# EAGLE board BudCure (EAGLE 9.6.2)
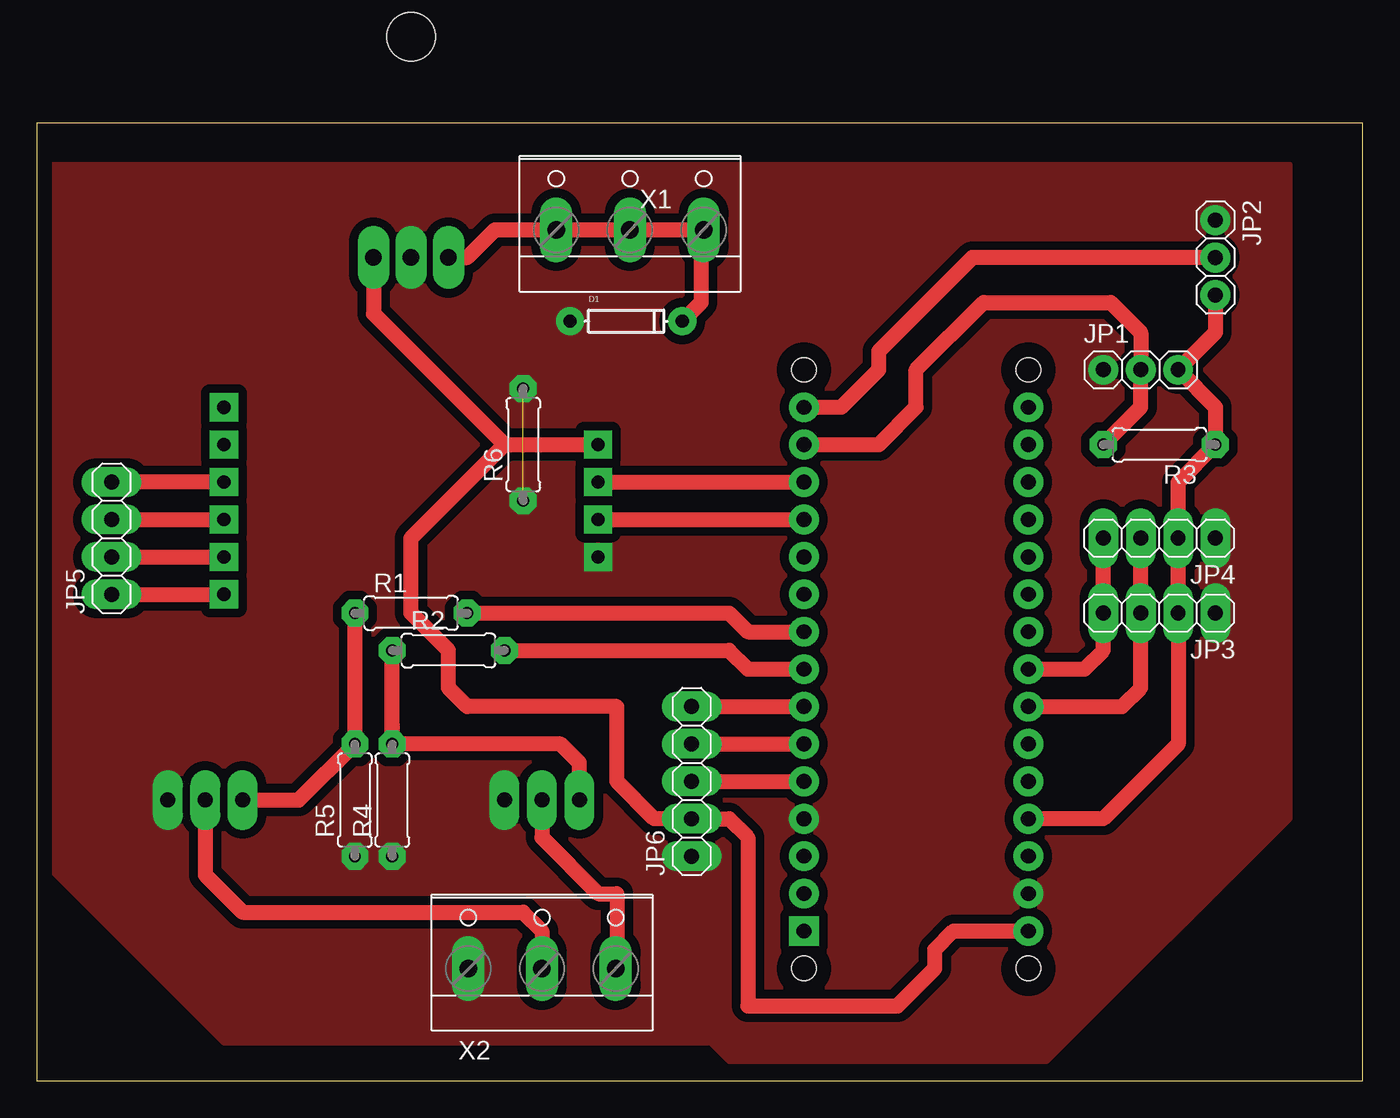
[diagram p0: board, top side]
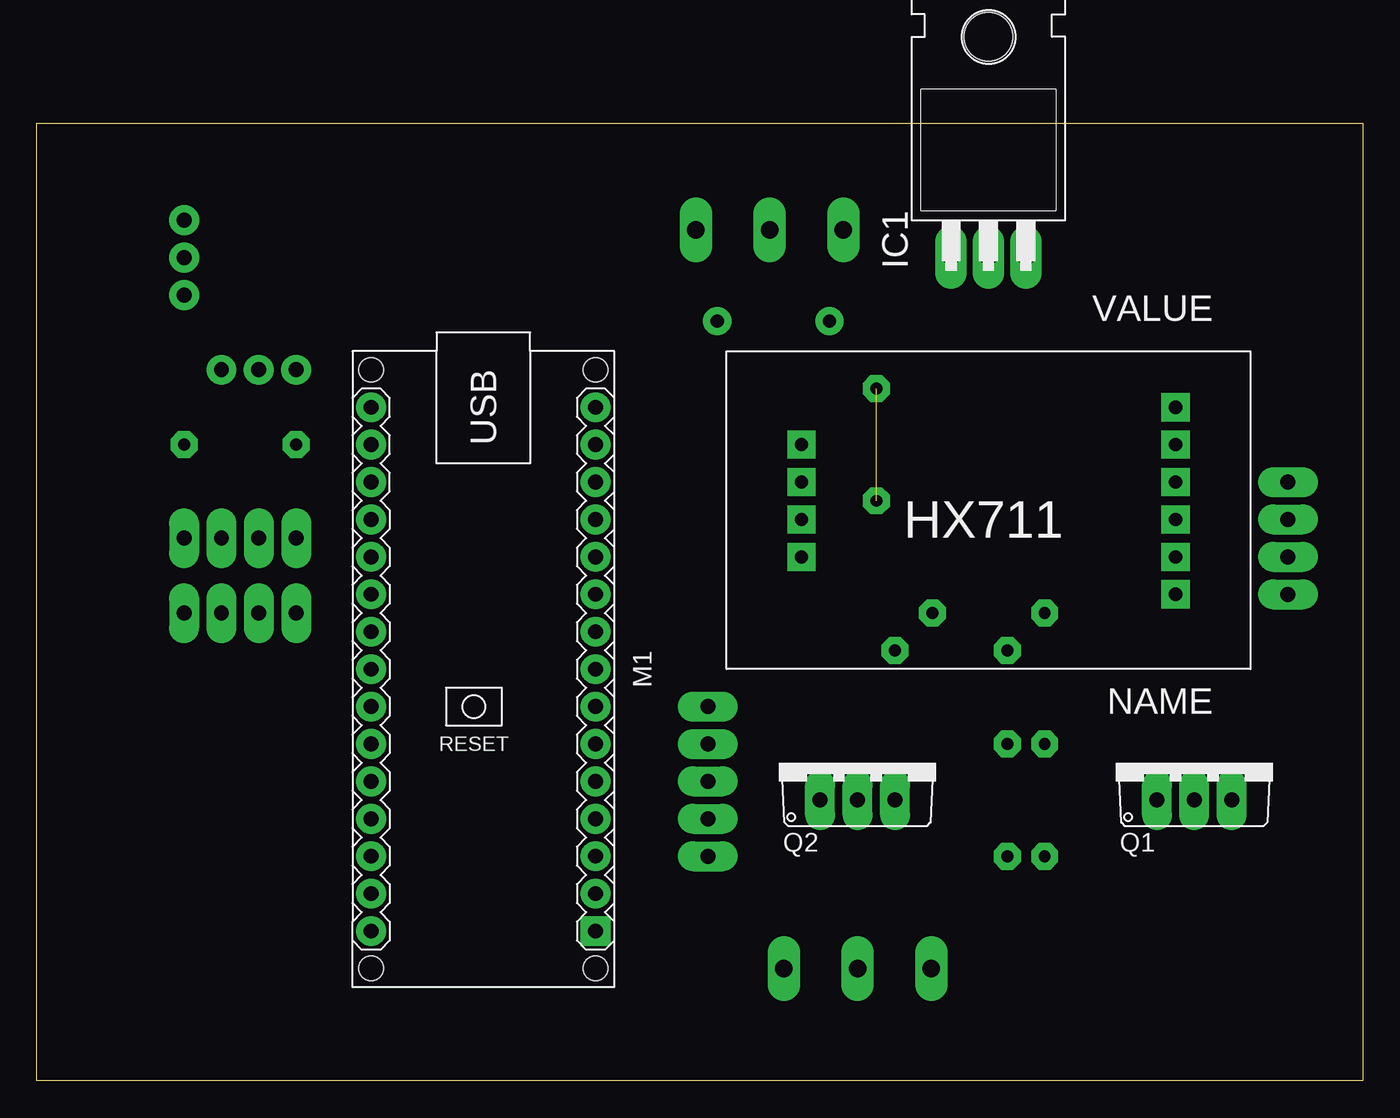
[diagram p1: board, bottom side, seen from below]

Size 90 x 65 mm. Coordinates in mm from the lower left corner, seen from the top.
Outline: 0,0 90,0 90,65 0,65 0,0
Copper layers (1*16): Top 0.035mm / dielectric 1.5mm / Bottom 0.035mm
Design rules "default *": minimum track width 6mil, minimum drill 0.35mm, track to track 6mil, track to pad 6mil, pad to pad 6mil, via to via 6mil, smd to smd 6mil, copper to edge 40mil, drill to drill 6mil, minimum pad ring 20mil, minimum via ring 8mil, stop-mask expansion 4mil, vias tented up to drill 0mil, thermal gap 0mil

## Footprints (pad centres in the part's own frame; a part is rotated, then mirrored left to right if it is on the bottom)
DO-1N4148 = drill 0.9: A -3.81,0; C 3.81,0
TO220H = drill 1.118 long: 1 -2.54,-10.16; 2 0,-10.16; 3 2.54,-10.16 | hole 3.302: 0,4.826
1X03 = drill 1.016: 1 -2.54,0; 2 0,0; 3 2.54,0
1X04 = drill 1.016 long: 1 -3.81,0; 2 -1.27,0; 3 1.27,0; 4 3.81,0
1X05 = drill 1.016 long: 1 -5.08,0; 2 -2.54,0; 3 0,0; 4 2.54,0; 5 5.08,0
ARDUINO-NANO-3.0 = drill 1 square: J1.1 17.78,7.62 | drill 1: J1.2 15.24,7.62; J1.3 12.7,7.62; J1.4 10.16,7.62; J1.5 7.62,7.62; J1.6 5.08,7.62; J1.7 2.54,7.62; J1.8 0,7.62; J1.9 -2.54,7.62; J1.10 -5.08,7.62; J1.11 -7.62,7.62; J1.12 -10.16,7.62; J1.13 -12.7,7.62; J1.14 -15.24,7.62; J1.15 -17.78,7.62; J2.1 17.78,-7.62; J2.2 15.24,-7.62; J2.3 12.7,-7.62; J2.4 10.16,-7.62; J2.5 7.62,-7.62; J2.6 5.08,-7.62; J2.7 2.54,-7.62; J2.8 0,-7.62; J2.9 -2.54,-7.62; J2.10 -5.08,-7.62; J2.11 -7.62,-7.62; J2.12 -10.16,-7.62; J2.13 -12.7,-7.62; J2.14 -15.24,-7.62; J2.15 -17.78,-7.62 | hole 1.651: -20.32,7.62; -20.32,-7.62; 20.32,-7.62; 20.32,7.62
TO220V = drill 1.016 long: 1 -2.54,-2.54; 2 0,-2.54; 3 2.54,-2.54
0207/7 = drill 0.813 octagon: 1 -3.81,0; 2 3.81,0
HX711 = drill 0.9 square: A+ 8.89,21.59; A- 8.89,24.13; B+ 8.89,16.51; B- 8.89,19.05; DT 34.29,24.13; E+ 8.89,29.21; E- 8.89,26.67; GND 34.29,26.67; SCK 34.29,21.59; VCC 34.29,19.05
W237-103 = drill 1.194 long: 1 -5,-1.29; 2 0,-1.29; 3 5,-1.29

## Placement (x,y rotation side)
D1  [DO-1N4148]  40.01,51.56 0 top
IC1  7805T  [TO220H]  25.4,66.04 0 bottom
JP1  [1X03]  74.93,48.26 0 top
JP2  [1X03]  80.01,55.88 270 top
JP3  [1X04]  76.2,31.75 180 top
JP4  [1X04]  76.2,36.83 180 top
JP5  [1X04]  5.08,36.83 90 top
JP6  [1X05]  44.45,20.32 90 top
M1  ARDUINO-NANO-3.0  [ARDUINO-NANO-3.0]  59.69,27.94 270 bottom
Q1  [TO220V]  11.43,21.59 0 bottom
Q2  [TO220V]  34.29,21.59 0 bottom
R1  [0207/7]  25.4,31.75 0 top
R2  [0207/7]  27.94,29.21 0 top
R3  [0207/7]  76.2,43.18 180 top
R4  [0207/7]  24.13,19.05 90 top
R5  [0207/7]  21.59,19.05 90 top
R6  [0207/7]  33.02,43.18 90 top
U$1  [HX711]  3.81,62.23 180 bottom
X1  [W237-103]  40.26,59.05 0 top
X2  [W237-103]  34.29,8.89 0 top

## Library data of the parts
D1 IC1 JP1 JP2 Q1 Q2 = adafruit
JP3-JP6 = pinhead
M1 = diy-modules
R1-R6 = rcl; SPICEPREFIX: R
U$1 = HX711
X1 X2 = con-wago-500; MPN: 237-103; OC_FARNELL: unknown; OC_NEWARK: 18M7116

## Nets
3V3: M1.J2.14
5V: IC1.3 JP6.2 M1.J2.1 U$1.VCC
GND: D1.A IC1.2 JP1.1 JP2.1 JP3.1 JP4.1 JP6.1 M1.J1.4 M1.J2.2 Q1.3 Q2.3 R4.1 R5.1 R6.1 R6.2 U$1.GND X2.1
N$1: M1.J1.8 R2.2
N$2: M1.J1.9 R1.2
N$3: JP6.3 M1.J1.5
N$4: JP6.4 M1.J1.6
N$5: JP5.1 U$1.E+
N$6: JP5.2 U$1.E-
N$7: JP1.3 JP2.3 JP3.2 JP4.2 M1.J2.4 R3.1
N$8: Q1.1 R1.1 R5.2
N$9: Q2.1 R2.1 R4.2
N$10: Q2.2 X2.3
N$11: Q1.2 X2.2
N$12: JP6.5 M1.J1.7
N$13: JP5.3 U$1.A-
N$14: JP5.4 U$1.A+
N$15: M1.J1.12 U$1.DT
N$16: M1.J1.13 U$1.SCK
N$17: JP3.3 JP4.3 M1.J2.7
N$18: JP3.4 JP4.4 M1.J2.8
N$20: JP1.2 M1.J1.14 R3.2
N$21: JP2.2 M1.J1.15
VIN: D1.C IC1.1 X1.1 X1.2 X1.3

## Tracks (layer width: path | path; a pad name or v marks a point on that pad's centre or on a via)
5V
  Top 1.016: M1.J2.1 62.23,10.16 60.96,8.89 60.96,7.62 58.42,5.08 48.26,5.08 48.26,16.51 46.99,17.78 JP6.2 41.91,17.78 39.37,20.32 39.37,25.4 29.21,25.4 27.94,26.67 27.94,29.21 25.4,31.75 25.4,36.83 31.75,43.18 | IC1.3 22.86,52.07 31.75,43.18 | 31.75,43.18 U$1.VCC
GND  (1 unrouted)
  pour Top (isolate 0.6): 0,62.23 0,15.24 12.7,2.54 45.72,2.54 46.99,1.27 68.58,1.27 85.09,17.78 85.09,62.23
N$1
  Top 1.016: R2.2 46.99,29.21 48.26,27.94 M1.J1.8
N$2
  Top 1.016: R1.2 46.99,31.75 48.26,30.48 M1.J1.9
N$3
  Top 1.016: JP6.3 M1.J1.5
N$4
  Top 1.016: JP6.4 M1.J1.6
N$5
  Top 1.016: JP5.1 U$1.E+
N$6
  Top 1.016: JP5.2 U$1.E-
N$7
  Top 1.016: M1.J2.4 72.39,17.78 77.47,22.86 JP3.2 JP4.2 77.47,40.64 R3.1 80.01,45.72 JP1.3 80.01,50.8 JP2.3
N$8
  Top 1.016: Q1.1 17.78,19.05 R5.2 R1.1
N$9
  Top 1.016: 24.26,29.08 R2.1 R4.2 | 24.13,24.13 R4.2 | Q2.1 36.83,21.59 35.56,22.86 R4.2
N$10
  Top 1.016: Q2.2 34.29,16.51 38.1,12.7 39.37,12.7 39.37,7.68 X2.3
N$11
  Top 1.016: Q1.2 11.43,13.97 13.97,11.43 33.02,11.43 34.29,10.16 X2.2
N$12
  Top 1.016: JP6.5 M1.J1.7
N$13
  Top 1.016: JP5.3 U$1.A-
N$14
  Top 1.016: U$1.A+ JP5.4
N$15
  Top 1.016: U$1.DT M1.J1.12
N$16
  Top 1.016: U$1.SCK M1.J1.13
N$17
  Top 1.016: M1.J2.7 73.66,25.4 74.93,26.67 JP3.3 JP4.3
N$18
  Top 1.016: M1.J2.8 71.12,27.94 72.39,29.21 JP3.4 JP4.4
N$20
  Top 1.016: R3.2 74.93,45.72 JP1.2 74.93,50.8 72.9,52.83 64.26,52.83 59.69,48.26 59.69,45.72 57.15,43.18 M1.J1.14
N$21
  Top 1.016: JP2.2 63.5,55.88 57.15,49.53 57.15,48.26 54.61,45.72 M1.J1.15
VIN
  Top 1.016: D1.C 45.09,52.83 45.09,57.59 X1.3 X1.2 X1.1 31.09,57.77 29.21,55.88 IC1.1